# EAGLE board Groupe 2 final PCB (EAGLE 9.6.2)
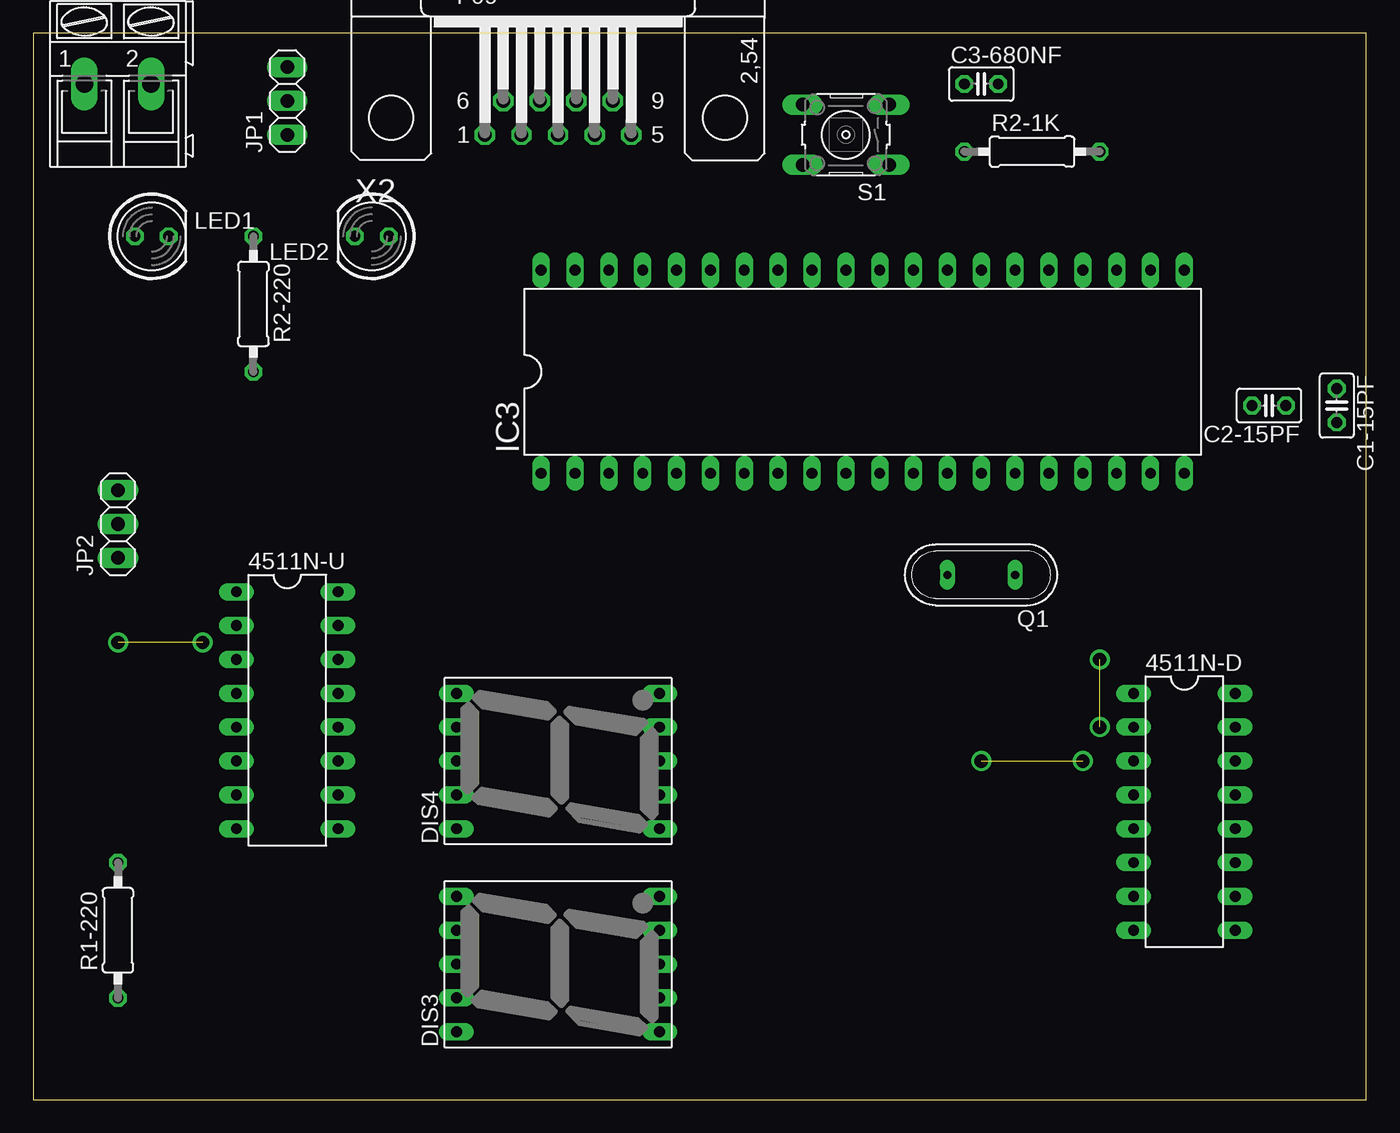
[diagram p0: board, top side]
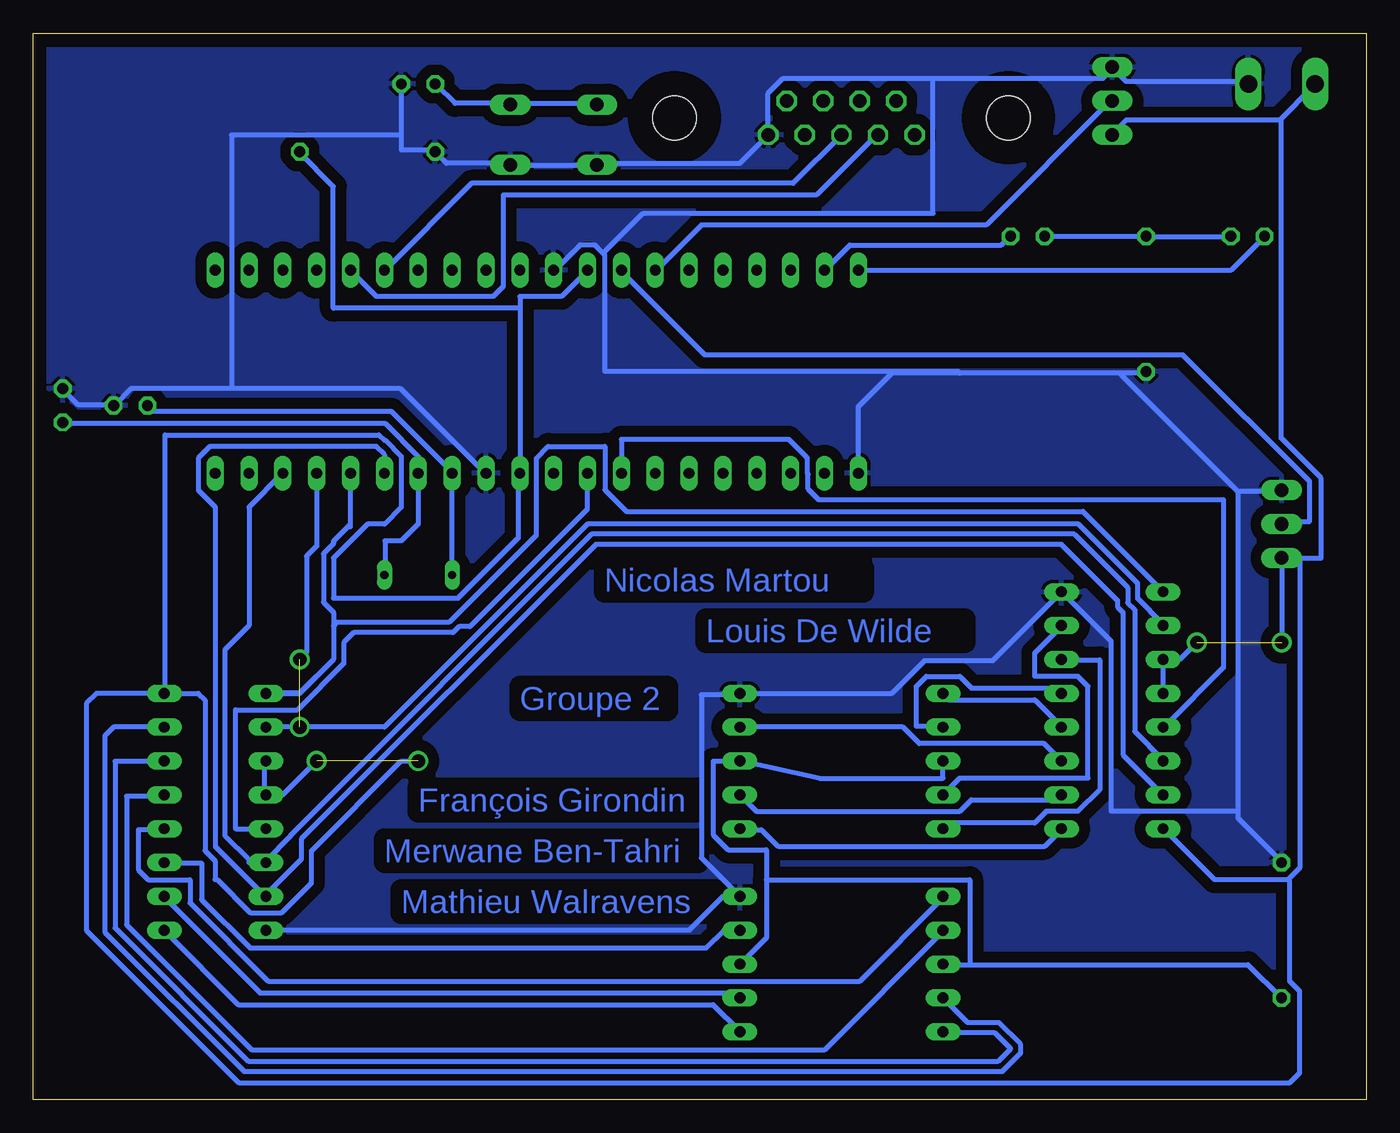
[diagram p1: board, bottom side, seen from below]

Size 100 x 80 mm. Coordinates in mm from the lower left corner, seen from the top.
Outline: 0,0 100,0 100,80 0,80 0,0
Copper layers (1*16): Top 0.035mm / dielectric 1.5mm / Bottom 0.035mm
Design rules "default *": minimum track width 15mil, minimum drill 0.35mm, track to track 15mil, track to pad 15mil, pad to pad 15mil, via to via 15mil, smd to smd 6mil, copper to edge 40mil, drill to drill 6mil, minimum pad ring 10mil, minimum via ring 8mil, stop-mask expansion 4mil, vias tented up to drill 0mil, thermal gap 10mil

## Footprints (pad centres in the part's own frame; a part is rotated, then mirrored left to right if it is on the bottom)
DIL16 = drill 0.813 long: 1 -8.89,-3.81; 2 -6.35,-3.81; 3 -3.81,-3.81; 4 -1.27,-3.81; 5 1.27,-3.81; 6 3.81,-3.81; 7 6.35,-3.81; 8 8.89,-3.81; 9 8.89,3.81; 10 6.35,3.81; 11 3.81,3.81; 12 1.27,3.81; 13 -1.27,3.81; 14 -3.81,3.81; 15 -6.35,3.81; 16 -8.89,3.81
C025-025X050 = drill 0.813 octagon: 1 -1.27,0; 2 1.27,0
HDSP-M = drill 0.813 long: 1 -5.08,-7.62; 2 -2.54,-7.62; 3 0,-7.62; 4 2.54,-7.62; 5 5.08,-7.62; 6 5.08,7.62; 7 2.54,7.62; 8 0,7.62; 9 -2.54,7.62; 10 -5.08,7.62
DIL40 = drill 0.813 long: 1 -24.13,-7.62; 2 -21.59,-7.62; 3 -19.05,-7.62; 4 -16.51,-7.62; 5 -13.97,-7.62; 6 -11.43,-7.62; 7 -8.89,-7.62; 8 -6.35,-7.62; 9 -3.81,-7.62; 10 -1.27,-7.62; 11 1.27,-7.62; 12 3.81,-7.62; 13 6.35,-7.62; 14 8.89,-7.62; 15 11.43,-7.62; 16 13.97,-7.62; 17 16.51,-7.62; 18 19.05,-7.62; 19 21.59,-7.62; 20 24.13,-7.62; 21 24.13,7.62; 22 21.59,7.62; 23 19.05,7.62; 24 16.51,7.62; 25 13.97,7.62; 26 11.43,7.62; 27 8.89,7.62; 28 6.35,7.62; 29 3.81,7.62; 30 1.27,7.62; 31 -1.27,7.62; 32 -3.81,7.62; 33 -6.35,7.62; 34 -8.89,7.62; 35 -11.43,7.62; 36 -13.97,7.62; 37 -16.51,7.62; 38 -19.05,7.62; 39 -21.59,7.62; 40 -24.13,7.62
1X03 = drill 1.016 long: 1 -2.54,0; 2 0,0; 3 2.54,0
LED5MM = drill 0.813 octagon: A -1.27,0; K 1.27,0
QS = drill 0.61 long: 1 -2.54,0; 2 2.54,0
0207/10 = drill 0.813 octagon: 1 -5.08,0; 2 5.08,0
B3F-10XX = drill 1.016 long: 1 -3.251,2.261; 2 3.251,2.261; 3 -3.251,-2.261; 4 3.251,-2.261
AK300/2 = drill 1.321 long: 1 -2.515,0; 2 2.489,0
F09H = drill 1.016 octagon: 1 -5.486,-1.27; 2 -2.743,-1.27; 3 0,-1.27; 4 2.743,-1.27; 5 5.486,-1.27; 6 -4.115,1.27; 7 -1.372,1.27; 8 1.372,1.27; 9 4.115,1.27 | hole 3.302: -12.522,0; 12.522,0

## Placement (x,y rotation side)
4511N-D  4511N  [DIL16]  86.36,21.59 270 top
4511N-U  4511N  [DIL16]  19.05,29.21 270 top
C1-15PF  [C025-025X050]  97.79,52.07 270 top
C2-15PF  [C025-025X050]  92.71,52.07 180 top
C3-680NF  [C025-025X050]  71.12,76.2 0 top
DIS3  HD-H103  [HDSP-M]  39.37,10.16 90 top
DIS4  HD-H103  [HDSP-M]  39.37,25.4 90 top
IC3  PIC16F877P  [DIL40]  62.23,54.61 0 top
JP1  [1X03]  19.05,74.93 90 top
JP2  [1X03]  6.35,43.18 90 top
LED1  [LED5MM]  8.89,64.77 0 top
LED2  [LED5MM]  25.4,64.77 180 top
Q1  [QS]  71.12,39.37 180 top
R1-220  [0207/10]  6.35,12.7 90 top
R2-1K  [0207/10]  74.93,71.12 0 top
R2-220  [0207/10]  16.51,59.69 270 top
S1  [B3F-10XX]  60.96,72.39 180 top
X1  [AK300/2]  6.35,76.2 0 top
X2  [F09H]  39.37,73.66 0 top

## Library data of the parts
4511N-D 4511N-U = 45xx
C1-15PF C2-15PF C3-680NF = rcl; SPICEPREFIX: C
DIS3 DIS4 = display-hp; OC_FARNELL: unknown; OC_NEWARK: unknown
IC3 = microchip; MF: MICROCHIP; MPN: PIC16F877-04/P; OC_FARNELL: 9761349; OC_NEWARK: 61K3463
JP1 JP2 = pinhead
LED1 LED2 = led
Q1 = special
R1-220 R2-1K R2-220 = rcl; SPICEPREFIX: R
S1 = switch-omron; MPN: B3F-1000; OC_FARNELL: 176432; OC_NEWARK: 36M3542
X1 = con-ptr500; OC_FARNELL: unknown; OC_NEWARK: unknown
X2 = con-subd; OC_FARNELL: unknown; OC_NEWARK: unknown

## Nets
GND: 4511N-D.8 4511N-U.16 C1-15PF.1 C2-15PF.1 C3-680NF.2 DIS3.5 DIS4.5 IC3.1 IC3.12 IC3.31 JP1.3 JP2.3 R1-220.2 R2-1K.1 R2-220.2 S1.1 S1.2 X1.2 X2.5
N$1: 4511N-D.5 IC3.9
N$2: 4511N-U.5 IC3.8
N$3: 4511N-D.6 4511N-U.6 IC3.18
N$4: 4511N-D.2 4511N-U.2 IC3.17
N$5: 4511N-D.1 4511N-U.1 IC3.16
N$6: 4511N-D.7 4511N-U.7 IC3.15
N$7: C2-15PF.2 IC3.13 Q1.2
N$8: C1-15PF.2 IC3.14 Q1.1
N$9: 4511N-D.14 DIS3.10
N$10: 4511N-D.15 DIS3.9
N$11: 4511N-D.9 DIS3.1
N$12: 4511N-D.10 DIS3.2
N$13: 4511N-D.11 DIS3.4
N$14: 4511N-D.12 DIS3.6
N$15: 4511N-D.13 DIS3.7
N$16: 4511N-U.14 DIS4.10
N$17: 4511N-U.15 DIS4.9
N$18: 4511N-U.9 DIS4.1
N$19: 4511N-U.10 DIS4.2
N$20: 4511N-U.11 DIS4.4
N$21: 4511N-U.12 DIS4.6
N$22: 4511N-U.13 DIS4.7
N$23: DIS3.3 DIS3.8 DIS4.3 DIS4.8 R1-220.1
N$24: IC3.33 JP2.2
N$25: C3-680NF.1 S1.3 S1.4
N$26: IC3.34 JP1.2
N$27: IC3.40 LED1.A
N$28: IC3.25 X2.2
N$29: IC3.26 X2.3
N$30: IC3.39 LED2.A
N$31: LED1.K LED2.K R2-220.1
VCC: 4511N-D.3 4511N-D.4 4511N-D.16 4511N-U.3 4511N-U.4 4511N-U.8 IC3.11 IC3.32 JP1.1 JP2.1 R2-1K.2 X1.1

## Tracks (layer width: path | path; a pad name or v marks a point on that pad's centre or on a via)
GND
  Bottom 0.381: 19,77.38 JP1.3 | 8.88,76.25 X1.2 | 19.12,77.25 JP1.3 | 8.75,76.12 X1.2 | 6.38,17.88 R1-220.2 6.5,18 9.62,21.12 9.62,21.62 | 85.12,53.38 92.62,53.38 93.88,52.12 C2-15PF.1 94.12,52.12 96.62,52.12 97.75,53.25 C1-15PF.1 | 85.12,53.38 72.5,53.38 66.12,47 IC3.12 | JP1.3 18.88,77.25 18,76.38 9,76.38 X1.2 | 72.38,72.38 72.38,71.25 69.88,71.25 R2-1K.1 69.75,71 69,70.25 64.25,70.25 S1.1 64.12,70.12 57.75,70.12 S1.2 57.62,70.25 47,70.25 44.88,72.38 X2.5 44.88,72.5 44.88,75.5 43.75,76.62 32.5,76.62 | 72.38,72.38 72.38,76.12 C3-680NF.2 | 32.5,76.62 19.75,76.62 19.25,77.12 JP1.3 | 85.12,53.38 85.12,72.38 72.38,72.38 | 4511N-D.8 50.8,12.7 49.31,14.19 48.26,15.24 DIS3.5 49.88,18.12 49.88,30.38 47,30.38 DIS4.5 35.59,30.48 33.15,32.92 28.04,32.92 4511N-U.16 22.75,38 19.12,34.38 19.12,21.62 9.62,21.62 | 9.62,45.62 9.62,21.62 | 9.62,45.62 6.38,45.62 JP2.3 | IC3.1 38.1,51.98 35.58,54.5 30.5,54.5 | 18.38,54.5 16.62,54.5 R2-220.2 | 18.38,54.5 30.5,54.5 | 57.25,63.5 57.12,63.38 57.12,54.62 30.62,54.62 30.5,54.5 | 57.25,63.5 57.88,64.12 59,64.12 60.88,62.25 IC3.31 | 9.62,45.62 18.38,54.38 18.38,54.5 | 32.5,76.62 32.5,66.5 54.25,66.5 57.25,63.5
  pour Bottom (isolate 0.813): 0,80.01 0,0 100.33,0 100.33,80.01
N$1
  Bottom 0.381: 4511N-D.5 84.83,20.32 84.83,29.25 80.18,29.25 76.72,32.71 76.72,34.29 75.97,35.04 68.51,35.04 68.06,35.49 67.24,35.49 58.42,44.31 IC3.9
N$2
  Bottom 0.381: 4511N-U.5 15.12,28 10.71,32.41 10.71,45 41.05,45 41.87,45.82 41.87,46.91 41.95,46.99 41.95,48.16 43.32,49.53 55.88,49.53 55.88,46.88 IC3.8
N$3
  Bottom 0.381: 4511N-U.6 15.25,25.5 17.38,27.62 17.38,36.76 17.89,37.27 17.89,38.41 21.91,42.42 58.1,42.42 80.66,19.86 80.66,19.81 82.55,17.92 4511N-D.6 82.5,17.88 82.59,17.78 83.82,17.78 83.82,17.97 85.59,19.75 85.59,33.79 83.82,35.56 83.82,44.45 IC3.18
N$4  (via drill 1 pad 1.3)  (1 unrouted)
  Bottom 0.381: 4511N-D.2 v80.01,27.94 73.66,27.94 58.42,43.18 21.59,43.18 17.13,38.72 17.13,37.59 15.24,35.7 4511N-U.2 | IC3.17 78.74,41.52 79.5,40.76 79.5,33.53 v80.01,33.02
N$5
  Bottom 0.381: 4511N-U.1 15.25,38.12 21.25,44.12 55.5,44.12 57.12,45.75 57.12,49 61.38,49 61.38,48.98 62.25,48.1 62.25,42.38 68.82,35.8 77.23,35.8 77.48,35.55 | 78.74,31.75 80.01,30.48 4511N-D.1 82.38,30.5 80.01,30.5 77.48,33.03 77.48,35.55 | 76.2,42.99 76.2,43.18 | 76.2,43.18 IC3.16 | 76.2,43.18 77.48,41.9 77.48,41.71 78.23,40.96 78.23,37.31 77.48,36.56 77.48,35.55
N$6
  Bottom 0.381: 4511N-U.7 15.25,22.88 18.25,25.88 18.25,36.55 18.66,36.96 18.66,37.45 22.86,41.66 57.79,41.66 79.9,19.55 79.9,18.03 82.55,15.38 4511N-D.7 82.62,15.25 86.36,18.98 86.36,44.45 87.63,45.72 87.63,48.12 86.75,49 74.27,49 73.66,48.39 IC3.15
N$7
  Bottom 0.381: Q1.2 68.62,39.38 68.62,46.88 IC3.13 68.62,47.12 73.12,51.62 91,51.62 91.38,52 C2-15PF.2
N$8
  Bottom 0.381: Q1.1 73.62,39.38 73.62,41.91 72.39,41.91 71.12,43.18 IC3.14 71.12,48.26 73.61,50.75 97.75,50.75 C1-15PF.2
N$9
  Bottom 0.381: DIS3.10 31.75,5 27.86,5 26.67,3.81 27.61,2.88 83.88,2.88 93.88,12.88 93.88,25.38 90.25,25.38 4511N-D.14
N$10
  Bottom 0.381: 4511N-D.15 93.98,27.94 94.64,27.28 94.64,12.56 84.19,2.11 27.29,2.11 25.91,3.49 25.91,4.13 27.54,5.76 29.89,5.76 DIS3.9
N$11
  Bottom 0.381: DIS3.1 47,5.12 49,7.12 84.62,7.12 90.12,12.62 4511N-D.9
N$12
  Bottom 0.381: DIS3.2 47.38,8 83,8 90.12,15.12 4511N-D.10
N$13
  Bottom 0.381: DIS3.4 48.2,12.7 49.52,11.38 83.75,11.38 87.38,15 87.38,17.75 90.12,17.75 4511N-D.11
N$14
  Bottom 0.381: DIS3.6 31.75,15.12 38,8.88 82.38,8.88 88.25,14.75 88.25,16.5 91.38,16.5 92.12,17.25 92.12,20.25 90.25,20.25 4511N-D.12
N$15
  Bottom 0.381: DIS3.7 31.75,12.62 40.62,3.75 83.62,3.75 93,13.12 93,22.75 90.25,22.75 4511N-D.13
N$16
  Bottom 0.381: DIS4.10 31.75,20.38 31.38,20.75 24.88,20.75 24,21.62 21.62,21.62 20,23.25 20,33 22.75,33 4511N-U.14
N$17
  Bottom 0.381: 4511N-U.15 22.88,35.5 24.88,33.5 24.88,31.75 21.62,31.75 20.88,31 20.88,24.12 30.5,24.12 31.75,22.88 DIS4.9
N$18
  Bottom 0.381: 4511N-U.9 22.88,20.25 24.12,19 44.12,19 45.38,20.25 46.88,20.25 DIS4.1
N$19
  Bottom 0.381: 4511N-U.10 22.88,22.75 23.12,22.5 29.62,22.5 30.5,21.62 45.75,21.62 46.88,22.75 DIS4.2
N$20
  Bottom 0.381: DIS4.4 34.77,27.94 33.54,26.71 24.17,26.71 4511N-U.11
N$21
  Bottom 0.381: 4511N-U.12 22.88,28 24.88,30 31.38,30 31.75,30.38 DIS4.6
N$22
  Bottom 0.381: 4511N-U.13 22.88,30.5 23.25,30.88 29.62,30.88 30.5,31.75 33,31.75 33.75,31 33.75,28 31.75,28 DIS4.7
N$23
  Bottom 0.381: 29.75,10.12 31.75,10.12 DIS3.8 | 29.75,10.12 8.88,10.12 6.38,7.62 R1-220.1 | 45,16.5 45,18.75 47.88,18.75 49,19.88 49,25.38 47,25.38 DIS4.3 41.03,24.11 31.75,24.11 DIS4.8 | 45,16.5 45,12.12 46.88,10.25 DIS3.3 | 29.75,10.12 29.75,16.5 45,16.5
N$24
  Bottom 0.381: 6.38,43.25 JP2.2 6.25,43.38 4.25,43.38 4.25,46.38 13.75,55.88 49.62,55.88 55.88,62.12 IC3.33
N$25
  Bottom 0.381: C3-680NF.1 69.75,76.12 68.38,74.75 64.25,74.75 S1.3 64.12,74.75 57.75,74.75 S1.4
N$26
  Bottom 0.381: 19,75 JP1.2 19.12,74.75 19.38,74.75 28.5,65.62 49.88,65.62 53.25,62.25 IC3.34
N$27
  Bottom 0.381: LED1.A 7.62,64.75 10.12,62.25 38,62.25 IC3.40
N$28
  Bottom 0.381: IC3.25 76.12,62.12 74.25,60.25 65.5,60.25 64.75,61 64.75,67.88 41.25,67.88 36.75,72.38 X2.2
N$29
  Bottom 0.381: IC3.26 73.62,62.25 67.12,68.75 43,68.75 39.38,72.38 X2.3
N$30
  Bottom 0.381: LED2.A 26.75,64.75 27.38,64.12 38.75,64.12 40.62,62.25 IC3.39
N$31
  Bottom 0.381: LED1.K 10.25,64.75 16.5,64.75 R2-220.1 16.62,64.75 24.12,64.75 LED2.K
VCC  (via drill 1 pad 1.3)  (2 unrouted)
  Bottom 0.381: 6.38,40.62 JP2.1 | 3.88,76.12 X1.1 4,76 6.5,73.5 | 6.5,73.5 18,73.5 19,72.5 JP1.1 | 5.88,16.5 11.38,16.5 15.12,20.25 4511N-U.8 | 5.88,16.5 5,17.38 5,40.5 6.25,40.5 JP2.1 | 6.5,73.5 6.38,73.38 6.38,49.62 3.38,46.62 3.38,40.62 4.88,40.62 JP2.1 | 63.5,59.38 63.5,60.25 60.38,60.25 58.5,62.12 IC3.32 | 63.5,59.38 IC3.11 63.62,46.88 63.62,42.12 68.12,37.62 77.47,37.62 77.47,40.64 74.93,43.18 73.66,43.18 72.39,44.45 72.39,48.26 73.6,49.47 73.66,49.47 74.07,49.88 90.12,49.88 90.12,30.5 4511N-D.16 | 63.5,59.38 77.5,59.38 77.5,68.5 80,71 R2-1K.2 | 5.88,16.5 5.75,16.38 5.75,8.88 5,8.12 5,2 5.73,1.27 84.59,1.27 96.02,12.7 96.02,29.71 95.25,30.48 4511N-D.16 | 4511N-U.4 4511N-U.3 13.97,33.02 v12.7,34.29 | 4511N-D.3 82.68,25.15 82.68,22.86 4511N-D.4 81.28,22.86 v78.74,25.4 | 4511N-D.16 87.63,30.48 87.12,29.97 87.12,18.66 86.36,17.91 86.36,16.51 86.22,16.51 83.72,14.01 81.38,14.01 79.13,16.25 79.13,18.66 72.39,25.4 v71.12,25.4 | JP2.1 v6.35,34.29

## Text on the board
Bottom: Nicolas Martou | Louis De Wilde | Groupe 2 | François Girondin | Merwane Ben-Tahri | Mathieu Walravens